# Altium PCB stm32f103cb_hm.PcbDoc
Units mm, origin at the board's own origin, x right, y up, seen from the top; angles counter-clockwise.
Board outline 49 x 35 mm, 2 copper layers (Top Layer, Bottom Layer), stack 1.571 mm thick; 61 components, 59 nets, 194 pads, 56 vias.
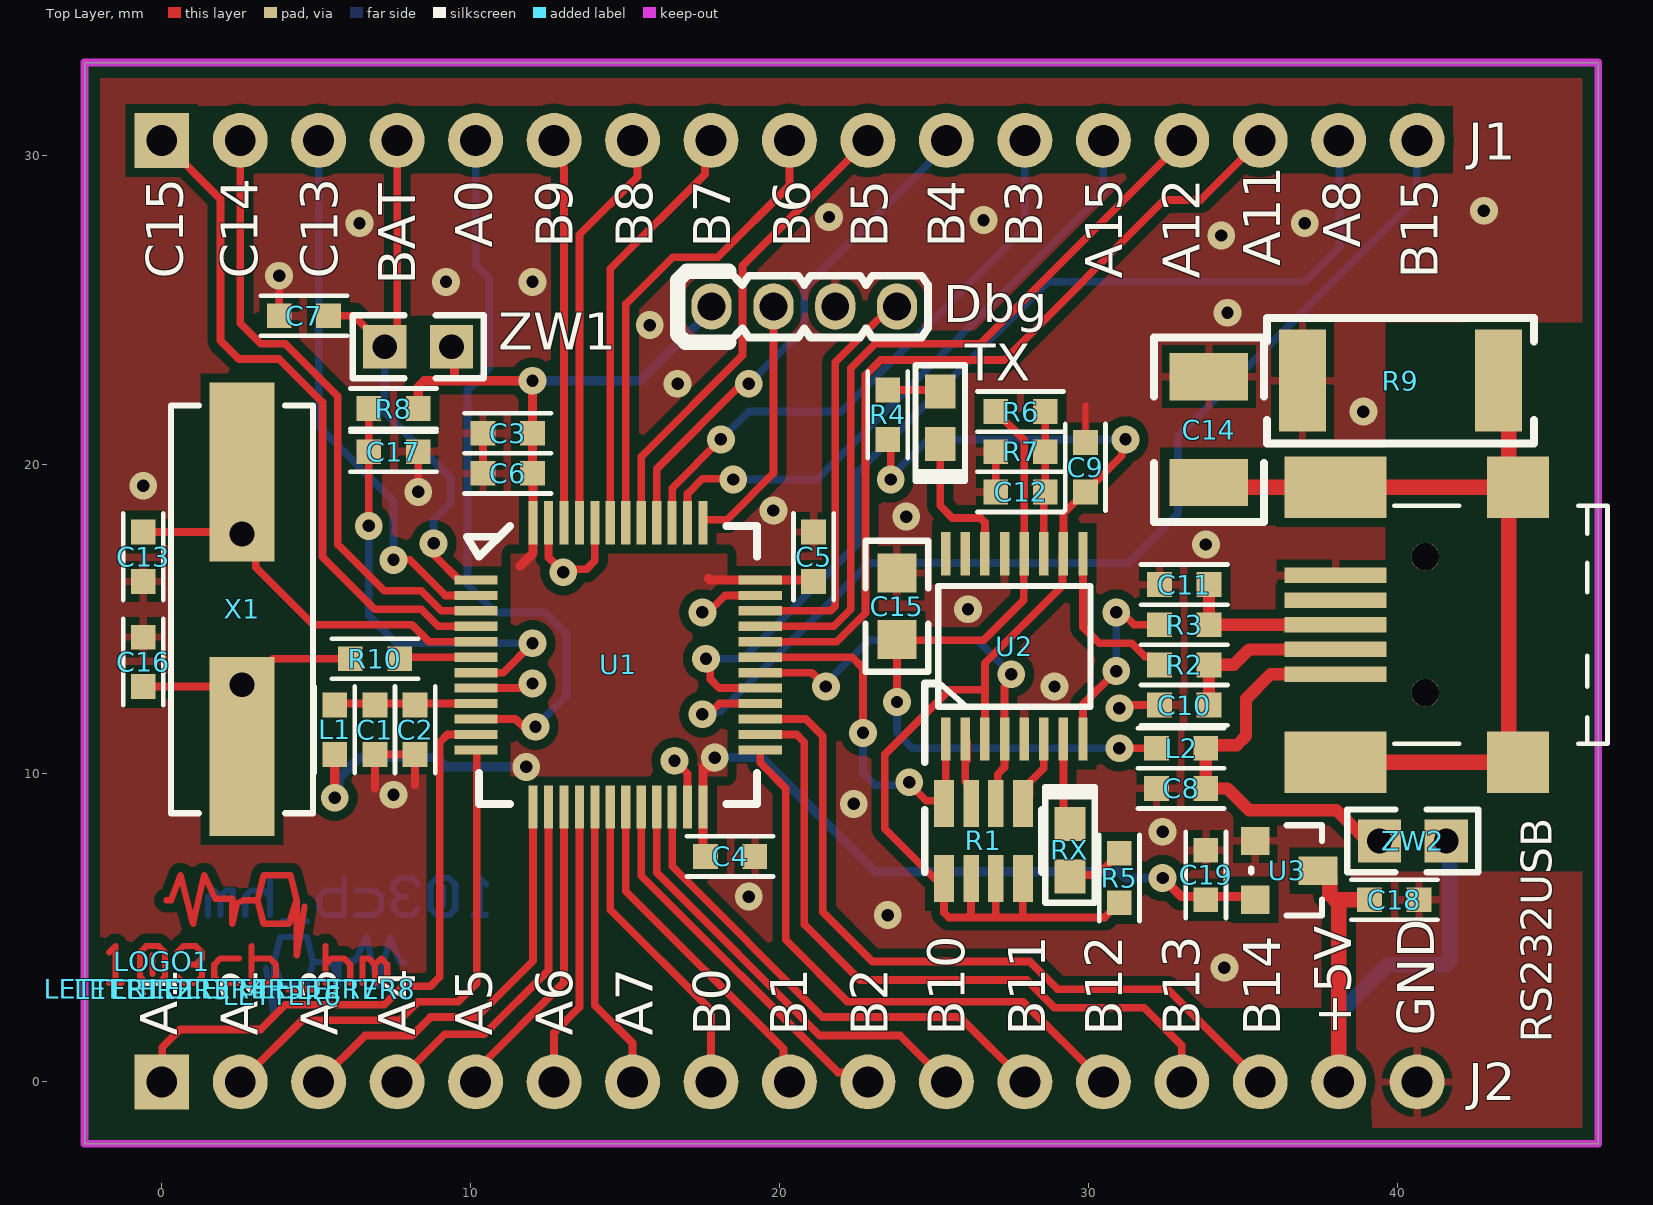
[diagram p0: Top Layer view]
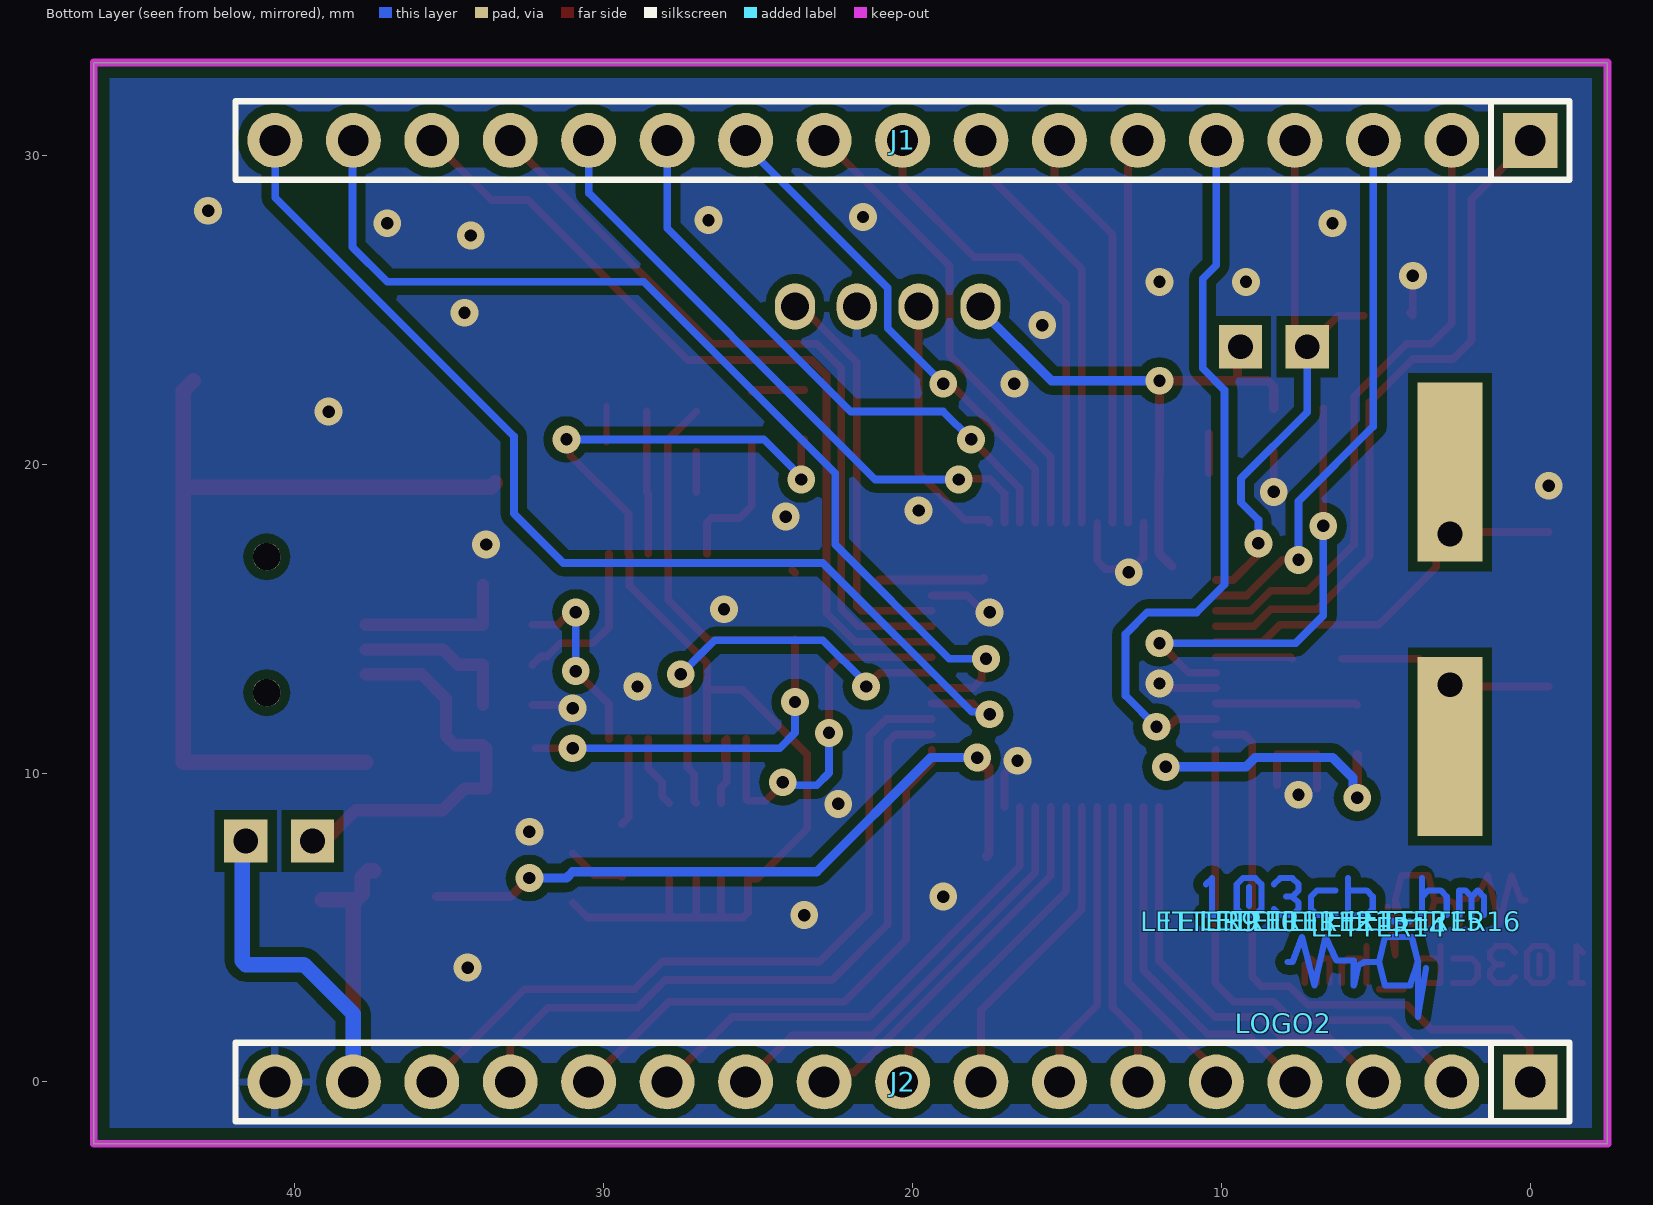
[diagram p1: Bottom Layer view, seen from below]

## Layer stack, top to bottom
Top Solder: solder mask 0.0102, Solder Resist, Dk 3.5
Top Layer: signal copper 0.0356
Dielectric 1: dielectric 1.5, FR-4, Dk 4.8
Bottom Layer: signal copper 0.0356
Bottom Solder: solder mask 0.0102, Solder Resist, Dk 3.5

## Board outline
-2.5,-2 46.5,-2 46.5,33 -2.5,33

## Design rules (kind name [scope] priority, off if disabled: settings)
AcuteAngle [All] p1: minimum=6.00000000000000E+0001 checktracksonly=TRUE
BoardOutlineClearance [not InComponent('RS232USB')] p1: gap=0.5 ignorepadtopadclearanceinfootprint=FALSE
Clearance InPolyClearance [InPoly] p1: gap=0.3 ignorepadtopadclearanceinfootprint=FALSE
Clearance ClearanceMidLayer [OnMid] p2: gap=0.153 ignorepadtopadclearanceinfootprint=FALSE
Clearance ClearanceOuterLayer [OnBottomLayer or OnTopLayer] p3: gap=0.153 ignorepadtopadclearanceinfootprint=FALSE
ComponentClearance [All] p1 off: gap=0.254 collisioncheckmode=3 verticalgap=0.254 showdistances=FALSE
Height [All] p1: minheight=0 maxheight=40 prefheight=12.7
HoleSize [All] p1: absolutevalues=TRUE maxlimit=6 minlimit=0.2 maxpercent=80.000 minpercent=20.000
MinimumAnnularRing MinimumAnnularRingOuterLayer [OnTopLayer or OnBottomLayer] p1: minimumring=0.155
MinimumAnnularRing MinimumAnnularRingOnMid [OnMid] p2: minimumring=0.2
MinimumSolderMaskSliver SilkscreenOverComponentPads [All] p1: minsoldermaskwidth=0.1
NetAntennae [All] p1: netantennaetolerance=0.3
PolygonConnect PolygonConnectDirect [IsVia] p1: connectstyle=Direct reliefconductorwidth=0.254 reliefentries=4 polygonreliefangle="90 Angle" airgapwidth=0.254
PolygonConnect PolygonConnectElse [All] p2: connectstyle=Relief reliefconductorwidth=0.25 reliefentries=4 polygonreliefangle="90 Angle" airgapwidth=0.25
RoutingCorners [All] p1 off: cornerstyle=45-Degree minsetback=2.54 maxsetback=2.54
RoutingVias [All] p1: holewidth=0.4 width=0.9 viastyle="Through Hole" minholewidth=0.3 minwidth=0.5 maxholewidth=2 maxwidth=4
SilkToSilkClearance [All] p1: silktosilkclearance=0.1
SilkToSolderMaskClearance SilkToSolderMaskClearanceVia [IsVia] p1: minsilkscreentomaskgap=0.1 clearancetoexposedcopper=TRUE
SilkToSolderMaskClearance SilkToSolderMaskClearancePad [IsPad] p2: minsilkscreentomaskgap=0.1 clearancetoexposedcopper=TRUE
SolderMaskExpansion [All] p1: expansion=0.1 istentingtop=FALSE
UnRoutedNet [All] p1: checkbadconnections=TRUE
UnpouredPolygon [All] p1: allowunpoured=TRUE
Width [All] p1: maxlimit=4 minlimit=0.102 preferedwidth=0.18 minimp=50.000000 maximp=50.000000 favimp=50.000000 checkconnectedcopper=TRUE
20 further rules are at their usual default settings.

## Components (designator, comment, footprint, x,y, rotation, side; value= is the part's Value field where it differs from the comment)
C1 "1u/16" 0603-IPC 6.9,11.4 r270 top
C2 "10n/50" 0603-IPC 8.2,11.4 r270 top
C3 "1u/16" 0603-IPC 11.2,21 r180 top
C4 "100n/50" 0603-IPC 18.4,7.3 r0 top
C5 "100n/50" 0603-IPC 21.1,17 r90 top
C6 "100n/50" 0603-IPC 11.2,19.7 r180 top
C7 "1u/16" 0603-IPC 4.6,24.8 r180 top
C8 "10n/50" 0603-IPC 33,9.5 r0 top
C9 "100n/50" 0603-IPC 29.9,19.9 r270 top
C10 "47p/50" 0603-IPC 33.1,12.2 r180 top
C11 "47p/50" 0603-IPC 33.1,16.1 r180 top
C12 "10n/50" 0603-IPC 27.8,19.1 r0 top
C13 "22p/50" 0603-IPC -0.6,17 r90 top
C14 "1n5/1k" 1210 33.9,19.4 r90 top
C15 "4u7/16" 0805 23.8,15.4 r90 top
C16 "22p/50" 0603-IPC -0.6,13.6 r270 top
C17 "100n/50" 0603-IPC 7.5,20.4 r0 top
C18 "1u/16" 0603-IPC 39.9,5.9 r0 top
C19 "1u/16" 0603-IPC 33.8,6.7 r90 top
Dbg "ZL303-04P" PLMS4S 17.8,25.1 r0 top
J1 "ZL201-17G" PLS17S 0,30.48 r0 bottom
J2 "ZL201-17G" PLS17S 0,0 r0 bottom
L1 "BLM18AG102SN1D" 0603-IPC 5.6,11.4 r270 top
L2 "BLM18AG102SN1D" 0603-IPC 33,10.8 r180 top
LETTER1 "LETTER_1_1m2_m2" LETTER_1_1m2_m2 -1.9,3 r0 top
LETTER2 "LETTER_0_1m2_m2" LETTER_0_1m2_m2 -0.9,3 r0 top
LETTER3 "LETTER_3_1m2_m2" LETTER_3_1m2_m2 0.3,3 r0 top
LETTER4 "LETTER_C_1m2_m2" LETTER_C_1m2_m2 1.5,3 r0 top
LETTER5 "LETTER_B_1M2_M2" LETTER_B_1M2_M2 2.7,3 r0 top
LETTER6 "LETTER_UNDERSCORE_1M2_M2" LETTER_UNDERSCORE_1M2_M2 3.9,2.8 r0 top
LETTER7 "LETTER_H_1M2_M2" LETTER_H_1M2_M2 5.1,3 r0 top
LETTER8 "LETTER_M_1M2_M2" LETTER_M_1M2_M2 6.3,3 r0 top
LETTER9 "LETTER_1_1m2_m2" LETTER_1_1m2_m2 10.7,5.2 r180 bottom
LETTER10 "LETTER_0_1m2_m2" LETTER_0_1m2_m2 9.7,5.2 r180 bottom
LETTER11 "LETTER_3_1m2_m2" LETTER_3_1m2_m2 8.5,5.2 r180 bottom
LETTER12 "LETTER_C_1m2_m2" LETTER_C_1m2_m2 7.3,5.2 r180 bottom
LETTER13 "LETTER_B_1M2_M2" LETTER_B_1M2_M2 6.1,5.2 r180 bottom
LETTER14 "LETTER_UNDERSCORE_1M2_M2" LETTER_UNDERSCORE_1M2_M2 4.9,5 r180 bottom
LETTER15 "LETTER_H_1M2_M2" LETTER_H_1M2_M2 3.7,5.2 r180 bottom
LETTER16 "LETTER_M_1M2_M2" LETTER_M_1M2_M2 2.5,5.2 r180 bottom
LOGO1 "MRQ_2_8" MRQ_2_8 0,3.9 r0 top
LOGO2 "MRQ_2_8" MRQ_2_8 8,1.9 r180 bottom
R1 "4x47k" 1206RP 26.6,7.8 r180 top
R2 "27R" 0603R 33.1,13.5 r180 top
R3 "27R" 0603R 33.1,14.8 r180 top
R4 "10k" 0603R 23.5,21.6 r270 top
R5 "10k" 0603R 31,6.6 r270 top
R6 "10k" 0603R 27.8,21.7 r0 top
R7 "15k" 0603R 27.8,20.4 r180 top
R8 "100k" 0603R 7.5,21.8 r180 top
R9 "910k" 2512 40.1,22.7 r0 top
R10 "220R" 0603R 6.9,13.7 r0 top
RS232USB "DS1104-BN0SR" USBMS1B5 38,14.8 r270 top
RX "KP-1608SGC" D0603 29.4,7.5 r90 top
TX "LED0603-RW120" D0603 25.2,21.5 r270 top
U1 "STM32F103CBT6" MS-026ABC 14.771,13.499 r0 top
U2 "FT230XS" MO-137AB 27.6,14.1 r90 top
U3 "MCP1700T3302ETT" SOT23-3 35.4,7.8 r270 top
X1 "8.00MHz" HC49/4HSMX_THT 2.6,15.3 r270 top
ZW1 "SHORT0805" SHORT0805 8.3,23.8 r0 top
ZW2 "SHORT0805" SHORT0805 40.5,7.8 r180 top

## Footprints (in the part's own frame and the unit in brackets; to place one, negate y for a bottom-side part, rotate by r counter-clockwise, add the part's x,y. Pads: shape width x height; smd on the part's side, far side on the other; paste and mask are expansions set on the pad)
0603-IPC [mm]
  rect 0.8x0.8 smd: 1(-0.8,0) 2(0.8,0)
  silkscreen extent -1.4,-0.65 1.4,0.65, body extent -0.8,-0.4 0.8,0.4, height 1
0603R [mm]
  rect 0.8x0.8 smd: 1(-0.8,0) 2(0.8,0)
  silkscreen extent -1.4,-0.65 1.4,0.65, body extent -0.8,-0.4 0.8,0.4, height 0.45
0805 [mil]
  rect 50x50 smd: 1(-42.5,0) 2(42.5,0)
  silkscreen extent -84,-40 84,40, body extent -39,-28 39,28, height 51
1206RP [mm]
  rect 0.65x1.524 smd: 1(-1.275,-1.219) 4(1.275,-1.219) 5(1.275,1.219) 8(-1.275,1.219)
  rect 0.5x1.524 smd: 2(-0.4,-1.219) 3(0.4,-1.219) 6(0.4,1.219) 7(-0.4,1.219)
  silkscreen extent -1.9,-1 1.9,1, body extent -1.6,-0.8 1.6,0.8, height 0.55
1210 [mil]
  rect 60x100 smd: 1(0,0) 2(135,0)
  silkscreen extent -50,-70 185,70, body extent 5,-49 130,49, height 75
2512 [mil]
  rect 60x130 smd: 1(125,0) 2(-125,0)
  silkscreen extent -170,-80 170,80, body extent -128,-63 128,63, height 26
D0603 [mm]
  rect 1.1x1 smd: ANOD(-0.85,0) CATH(0.85,0)
  silkscreen extent -1.7,-0.8 2.05,0.8, body extent -1.06,-0.7 0.94,0.7, height 1.35
HC49/4HSMX_THT [mm]
  rect 5.8x2.1 hole 0.8 copper offset -2,0: 1(-2.44,0)
  rect 5.8x2.1 hole 0.8 copper offset 2,0: 2(2.44,0)
  silkscreen extent -6.6,-2.3 6.6,2.3, body extent -6.35,-2.4 6.35,2.4, height 4
LETTER_0_1m2_m2 [mm]
  Top Layer lines w0.2: 0.6,0.5 0.6,1.1 ; 0.2,0.4 0.4,0.2 0.8,0.2 1,0.4 1,1.2 0.8,1.4 0.4,1.4 0.2,1.2 0.2,0.4
LETTER_1_1m2_m2 [mm]
  Top Layer lines w0.2: 0.2,0.2 0.6,0.2 ; 0.2,1.2 0.4,1.4 0.4,0.2
LETTER_3_1m2_m2 [mm]
  Top Layer lines w0.2: 0.2,0.4 0.4,0.2 0.8,0.2 1,0.4 1,0.6 0.8,0.8 ; 0.2,1.2 0.4,1.4 0.8,1.4 1,1.2 1,1 0.8,0.8 ; 0.6,0.8 0.8,0.8 ; 0.8,0.8 0.8,0.8 ; 0.8,0.8 0.8,0.8
LETTER_B_1M2_M2 [mm]
  Top Layer lines w0.2: 0.2,1 0.8,1 1,0.8 1,0.4 0.8,0.2 0.2,0.2 0.2,1.4
LETTER_C_1m2_m2 [mm]
  Top Layer lines w0.2: 1,0.2 0.4,0.2 0.2,0.4 0.2,0.8 0.4,1 1,1
LETTER_H_1M2_M2 [mm]
  Top Layer lines w0.2: 0.2,0.2 0.2,1.4 ; 0.2,0.8 0.4,1 0.8,1 1,0.8 1,0.2
LETTER_M_1M2_M2 [mm]
  Top Layer lines w0.2: 0.2,0.2 0.2,1 0.4,1 0.6,0.8 ; 0.6,0.2 0.6,0.8 ; 1,0.2 1,0.8 ; 0.6,0.8 0.8,1 1,0.8 ; 1,0.8 1,0.8
LETTER_UNDERSCORE_1M2_M2 [mm]
  Top Layer lines w0.2: 0.2,0.2 1,0.2
MO-137AB [mil]
  rect 55x12 smd: 1(-118,87.5) 2(-118,62.5) 3(-118,37.5) 4(-118,12.5) 5(-118,-12.5) 6(-118,-37.5) 7(-118,-62.5) 8(-118,-87.5) 9(118,-87.5) 10(118,-62.5) 11(118,-37.5) 12(118,-12.5) 13(118,12.5) 14(118,37.5) 15(118,62.5) 16(118,87.5)
  silkscreen extent -148,-97 77,114, body extent -119,-98 119,98, height 70
MRQ_2_8 [mm]
  Top Layer lines w0.203: 0.152,1.981 0.305,1.981 0.61,2.794 1.016,1.219 1.372,2.794 1.727,2.032 2.286,2.032 2.286,1.219 2.438,1.88 2.642,1.981 3.099,1.981 ; 4.623,1.778 4.369,0.203 4.369,1.981 ; 3.099,1.981 3.302,1.219 4.115,1.219 4.369,1.981 ; 3.099,1.981 3.302,2.794 4.166,2.794 4.369,1.981
  body extent 0.05,0.1 4.72,2.9, height 0.3
MS-026ABC [mm]
  rect 1.4x0.3 smd: 1(-4.6,2.75) 2(-4.6,2.25) 3(-4.6,1.75) 4(-4.6,1.25) 5(-4.6,0.75) 6(-4.6,0.25) 7(-4.6,-0.25) 8(-4.6,-0.75) 9(-4.6,-1.25) 10(-4.6,-1.75) 11(-4.6,-2.25) 12(-4.6,-2.75) 25(4.6,-2.75) 26(4.6,-2.25) 27(4.6,-1.75) 28(4.6,-1.25) 29(4.6,-0.75) 30(4.6,-0.25) 31(4.6,0.25) 32(4.6,0.75) 33(4.6,1.25) 34(4.6,1.75) 35(4.6,2.25) 36(4.6,2.75)
  rect 0.3x1.4 smd: 13(-2.75,-4.6) 14(-2.25,-4.6) 15(-1.75,-4.6) 16(-1.25,-4.6) 17(-0.75,-4.6) 18(-0.25,-4.6) 19(0.25,-4.6) 20(0.75,-4.6) 21(1.25,-4.6) 22(1.75,-4.6) 23(2.25,-4.6) 24(2.75,-4.6) 37(2.75,4.6) 38(2.25,4.6) 39(1.75,4.6) 40(1.25,4.6) 41(0.75,4.6) 42(0.25,4.6) 43(-0.25,4.6) 44(-0.75,4.6) 45(-1.25,4.6) 46(-1.75,4.6) 47(-2.25,4.6) 48(-2.75,4.6)
  silkscreen extent -4.9,-4.5 4.5,4.5, body extent -4.5,-4.5 4.5,4.5, height 1.6
PLMS4S [mm]
  oval 1.3x1.5 hole 0.9: 1(0,0) 2(2,0) 3(4,0) 4(6,0)
  silkscreen extent -1.1,-1.15 7,1.15, body extent -1,-1 7,1, height 6
PLS17S [mil]
  rect 70x70 hole 39.37: 1(0,0)
  round 70 hole 39.37: 2(100,0) 3(200,0) 4(300,0) 5(400,0) 6(500,0) 7(600,0) 8(700,0) 9(800,0) 10(900,0) 11(1000,0) 12(1100,0) 13(1200,0) 14(1300,0) 15(1400,0) 16(1500,0) 17(1600,0)
  silkscreen extent -50,-50 1650,50, body extent -50,-50 1650,50, height 336
SHORT0805 [mm]
  rect 1.4x1.4 hole 0.8: 1(-1.079,0) 2(1.079,0)
  silkscreen extent -2.12,-1.02 2.12,1.02, body extent -1.5,-0.4 1.5,0.4, height 0.9
SOT23-3 [mil]
  rect 36x36 smd: 1(0,0) 2(75,0)
  rect 36x50 smd: 3(38,80)
  silkscreen extent -20,-5 95,85, body extent -22,-7 97,87, height 43
USBMS1B5 [mm]
  rect 0.5x3.3 smd: 1(1.6,0) 2(0.8,0) 3(0,0) 4(-0.8,0) 5(-1.6,0)
  rect 1.981x3.302 smd: 6(-4.45,0) 9(4.45,0)
  rect 1.981x2 smd: 7(-4.45,5.9) 8(4.45,5.9)
  round 0.9 hole 0.9: 10(-2.2,2.9) 11(2.2,2.9)
  silkscreen extent -3.85,1.9 3.85,8.8, body extent -4.95,-0.4 4.95,8.8, height 4.14

## Part data
C1 C3 C7 C18 C19: library part CAP37, Manufacturer5=Samsung, DateOfPrice5=2020-05-10, Descript="Kondensator: ceramiczny; MLCC; 1uF; 16V; X7R; ±10%; SMD; 0603", ID=37, Kod=CAP37, Price5=0,07, Reference5=CL10B105KO8NNNC, Supplier5=tme.pl, Typ5=CL10B105KO8NNNC
C2 C8 C12: library part CAP20, Manufacturer5=AVX, DateOfPrice5=2020-05-10, Descript="Kondensator: ceramiczny; MLCC; 10nF; 50V; X7R; ±10%; SMD; 0603", ID=20, Kod=CAP20, Price5=0,08, Reference5=06035C103KAT2A, Supplier5=tme.pl, Typ5=06035C103KAT2A
C4 C5 C6 C9 C17: library part CAP6, Manufacturer5=Samsung, DateOfPrice5=2020-05-10, Descript="Kondensator: ceramiczny; MLCC; 100nF; 50V; X7R; ±5%; SMD; 0603", ID=6, Kod=CAP6, Price5=0,25, Reference5=CL10B104JB8NNNC, Supplier5=tme.pl, Typ5=CL10B104JB8NNNC
C10 C11: library part CAP85, Manufacturer5=Yageo, DateOfPrice5=2020-05-10, Descript="Kondensator: ceramiczny; MLCC; 47pF; 50V; C0G; ±5%; SMD; 0603", ID=85, Kod=CAP85, Price5=0,08, Reference5=CC0603JRNPO9470, Supplier5=tme.pl, Typ5=CC0603JRNPO9BN470
C13 C16: library part CAP53, Manufacturer5=Yageo, DateOfPrice5=2010-01-01, Descript="Kondensator: ceramiczny; MLCC; 22pF; 50V; C0G; ±5%; SMD; 0603", ID=53, Kod=CAP53, Price5=0, Reference5=CC0603JRNPO9220, Supplier5=tme.pl, Typ5=CC0603JRNPO9BN220
C14: library part CAP35, Manufacturer5=MULTICOMP, DateOfPrice5=2020-05-10, Descript="Ceramiczny kondensator wielowarstw. SMD, 1210 [jedn. metryczne: 3225], 1500 pF, 1 kV, ± 10%, X7R", ID=35, Kod=CAP35, Price5=2,4, Reference5=1855964, Supplier5=farnell.com, Typ5=MCCA000836
C15: library part CAP97, Manufacturer5=Kemet, DateOfPrice5=2020-05-10, Descript="Kondensator: ceramiczny; MLCC; 4,7uF; 16VDC; X7R; ±5%; SMD; 0805", ID=97, Kod=CAP97, Price5=1,5, Reference5=C0805C475J4RACAUTO, Supplier5=tme.pl, Typ5=C0805C475J4RACAUTO
Dbg: library part Con298, Manufacturer5=Ninigi, DateOfPrice5=2020-05-10, Descript="Listwa kołkowa; kołkowe; męskie; PIN:4; proste; 2mm; THT; 1x4", ID=298, Kod=Con298, Price5=0,2, Reference5=ZL303-04P, Replacement=bd, Supplier5=tme.pl, Typ5=ZL303-04P
J1 J2: library part CON82, Manufacturer5=Connfly, DateOfPrice5=2020-12-08, Descript="Listwa kołkowa; kołkowe; męskie; PIN: 20; proste; 2,54mm; THT; 1x20", ID=82, Kod=CON82, Price5=1, Reference5=ZL201-20G, Replacement=bd, Supplier5=tme, Typ5=DS1021-1*20SF11
L1 L2: library part Ind41, InductCurr=-, Manufacturer5=Murata, DateOfPrice5=2020-05-10, Descript="Ferryt: koralik; Imp.@ 100MHz:1000om; Montaż: SMD; 0,4A; Obud:0603", ID=41, Kod=Ind41, Price5=0, Reference5=BLM18AG102SN1D, Supplier5=tme.pl, Typ5=BLM18AG102SN1D
LETTER1 LETTER9: library part NOB9, Descript=bd, ID=9, Kod=NOB9
LETTER2 LETTER10: library part NOB8, Descript=bd, ID=8, Kod=NOB8
LETTER3 LETTER11: library part NOB11, Descript=bd, ID=11, Kod=NOB11
LETTER4 LETTER12: library part NOB13, Descript=bd, ID=13, Kod=NOB13
LETTER5 LETTER13: library part NOB15, Descript=bd, ID=15, Kod=NOB15
LETTER6 LETTER14: library part NOB17, Descript=bd, ID=17, Kod=NOB17
LETTER7 LETTER15: library part NOB19, Descript=bd, ID=19, Kod=NOB19
LETTER8 LETTER16: library part NOB21, Descript=bd, ID=21, Kod=NOB21
LOGO1 LOGO2: library part NOB5, Descript=bd, ID=5, Kod=NOB5
R1: library part Res182, Manufacturer5="Royal Ohm", DateOfPrice5=2020-05-10, Descript="Drabinka rezystorowa: Y; 47kΩ; SMD; 1206; Il.rezystorów:4; 63mW", ID=182, Kod=Res182, Price5=0,1, Reference5=DR1206-47K-4/8, Supplier5=tme.pl, Typ5=4D03WGJ0473T
R2 R3: library part Res106, Manufacturer5="Royal Ohm", DateOfPrice5=2020-05-10, Descript="Rezystor: thick film; SMD; 0603; 27Ω; 0,1W; ±1%; -55÷125°C", ID=106, Kod=Res106, Price5=0,1, Reference5=SMD0603-27R-1%, Supplier5=tme.pl, Typ5=0603SAF270JT5E
R4 R5 R6: library part Res15, Manufacturer5="Royal Ohm", DateOfPrice5=2020-05-10, Descript="Rezystor: thick film; SMD; 0603; 10kom; 0,1W; ±1%; -55÷125°C", ID=15, Kod=Res15, Price5=0,08, Reference5=SMD0603-10K-1%, Supplier5=tme.pl, Typ5="0603WGF 10K T5E"
R7: library part Res39, Manufacturer5="Royal Ohm", DateOfPrice5=2020-05-10, Descript="Rezystor: thick film; SMD; 0603; 15kΩ; 0,1W; ±1%; -55÷125°C", ID=39, Kod=Res39, Price5=0,08, Reference5=SMD0603-15K-1%, Supplier5=tme.pl, Typ5=0603WGF15KT5E
R8: library part Res9, Manufacturer5="Royal Ohm", DateOfPrice5=2020-06-25, Descript="Rezystor: thick film; SMD; 0603; 100kom; 0,1W; ±1%; -55÷125°C", ID=9, Kod=Res9, Price5=0,1, Reference5=SMD0603-100K-1%, Supplier5=tme.pl, Typ5=0603SAF1003T5E
R9: library part Res235, Manufacturer5=Panasonic, DateOfPrice5=2020-05-10, Descript="Rezystor SMD, grubowarstwowy, 2512 [jedn. metryczne: 6432], 910 kohm, Seria ERJU1T, 200 V", ID=235, Kod=Res235, Price5=1,14, Reference5=2381073, Supplier5=farnell, Typ5=ERJU1TF9103U
R10: library part Res87, Manufacturer5="Royal Ohm", DateOfPrice5=2020-06-25, Descript="Rezystor: thick film; SMD; 0603; 220om; 0,1W; ±1%; -55÷125°C", ID=87, Kod=Res87, Price5=0,1, Reference5=SMD0603-220R-1%, Supplier5=tme.pl, Typ5=0603SAF2200T5E
RS232USB: library part Con41, Manufacturer5=Connfly, DateOfPrice5=2010-01-01, Descript="Gniazdo; USB B mini; SMT; PIN: 5; poziome; Opakowanie: taśma", ID=41, Kod=Con41, Price5=2, Reference5=MUSB-G5P, Replacement=bd, Supplier5=tme.pl, Typ5=DS1104-BN0SR
RX: library part Opt8, Manufacturer5="Kingbright Electronic", DateOfPrice5=2020-05-10, Descript="LED; SMD; 0603; zielony; 4-15mcd; 120°; 1,6x0,8mm", ID=8, Kod=Opt8, Price5=0,8, Reference5=KP-1608SGC, Supplier5=tme.pl, Typ5=KP-1608SGC
TX: library part Opt25, Manufacturer5=Honglitronic, DateOfPrice5=2020-05-10, Descript="Dioda LED, SMD 0603, Czerwona 626-636nm, 50-70 mCd /10mA, water clear, 120°", ID=25, Kod=Opt25, Price5=0,12, Reference5=LED0603-RW120, Supplier5=maritex.com.pl, Typ5=LED0603-RW120
U1: library part ICs272, Manufacturer5=ST, DateOfPrice5=2020-05-10, Descript="ARM Cortex-M3 CPU, 128kB Flash, 20kB RAM, USB, CAN, 3xUART, 2xI2C, 2xSPI, ADC, STM, LQFP48, RoHS", ID=272, Kod=ICs272, Price5=13, Reference5=42865, Supplier5=kamami.pl, Typ5=STM32F103CBT6
U2: library part ICs109, Manufacturer5=FTDI, DateOfPrice5=2020-05-10, Descript="Interfejs; USB-basic UART; Ilość pinów CBUS:4; tuba; SSOP16", ID=109, Kod=ICs109, Price5=8,8, Reference5=FT230XS-R, Supplier5=tme.pl, Typ5=FT230XS-R
U3: library part ICs182, Manufacturer5=Microchip, DateOfPrice5=2020-05-10, Descript="Stabilizator napięcia; LDO, nieregulowany; 3,3V; 0,25A; SOT23-3", ID=182, Kod=ICs182, Price5=1,8, Reference5=MCP1700T3302ETT, Supplier5=tme.pl, Typ5=MCP1700T3302E/TT
X1: library part Qua16, Freq=-, Manufacturer5=YIC, DateOfPrice5=2020-05-10, Descript="Rezonator: kwarcowy; 8MHz; ±30ppm; 20pF; SMD; HC49SM", ID=16, Kod=Qua16, Price5=2, Reference5=8.00M-SMDHC49S, Supplier5=tme.pl
ZW1 ZW2: library part Res238, Manufacturer5=-, Descript="Przewlekana zwora z drutu na planie rezystora 0805", ID=238, Kod=Res238, Price5=0,1, Reference5=-, Supplier5=-, Typ5=-

## Via types
v1: diameter 0.9, hole 0.4, Top Layer to Bottom Layer, 56 vias

## Nets (pads, with @x,y where several pads share a name; then routed paths per layer and width w, separated by ;. In a path a pad name is that pad's centre, name@x,y a point inside that pad or via, vN(x,y) a via of type N, cw(c..) or ccw(c..) an arc to the next point about the centre after c; other vN are vias at no path point)
+3V3: C3.1 C4.1 C5.1 C6.1 C19.1 Dbg.1 L1.2 R8.1 U1.24 U1.36 U1.48 U3.2 ZW1.2 | length 53.6
  Top Layer w0.3: v1(5.6,9.2) L1.2 ; R8.1 8.3,22.5 8.5,22.7 9.5,22.7 ; ZW1.2@9.48,23.8 9.48,22.72 9.5,22.7 ; 11.6,16.7 12.021,17.121 U1.48 12.021,19.679 C6.1 C3.1 v1(12,22.7) 9.5,22.7 ; C4.1 17.521,7.379 U1.24 17.521,10.179 17.9,10.179 v1(17.9,10.5) ; 17.7,16.3 17.751,16.249 U1.36 21.051,16.249 C5.1 ; v1(32.4,6.6) 33,6 U3.2@35.4,6
  Bottom Layer w0.3: v1(5.6,9.2) 5.738,9.338 5.738,9.838 6.4,10.5 8.9,10.5 9.2,10.2 v1(11.8,10.2) ; v1(12,22.7) 15.5,22.7 17.8,25 Dbg.1 ; v1(17.9,10.5) 19.4,10.5 23.1,6.8 31,6.8 31.2,6.6 v1(32.4,6.6)
+5V: C18.1 J2.16 U3.3 ZW2.1 | length 18.4
  Top Layer w0.5: U3.3 37.61,6.835 37.817,6.628 37.817,6.083 38.1,5.8 ; J2.16 38.1,5.9 C18.1
  Bottom Layer w0.5: J2.16 38.1,2.2 39.7,3.8 41.583,3.8 41.7,3.917 41.7,7.28 ZW2.1@41.58,7.4
DIAG-RXD: R1.4 U1.31 U2.1 | length 12
  Top Layer w0.25: U1.31 22.351,13.749 22.7,13.4 v1(22.7,11.3) ; v1(24.2,9.7) 24.2,9.652 24.752,9.1 25.325,9.1 25.378,9.153 U2.1
  Bottom Layer w0.25: v1(22.7,11.3) 22.7,10 23.1,9.6 24.1,9.6 v1(24.2,9.7)
DIAG-TXD: R1.2 U1.30 U2.4 | length 13.8
  Top Layer w0.25: U1.30 21.051,13.249 v1(21.5,12.8) ; R1.2 27.064,9.083 27.064,9.964 27.283,10.183 U2.4 27.283,12.788 27.5,13.005 v1(27.5,13.2)
  Bottom Layer w0.25: v1(21.5,12.8) 21.5,12.9 22.9,14.3 26.4,14.3 26.781,13.919 v1(27.5,13.2)
GND: C1.2 C2.2 C3.2 C4.2 C5.2 C6.2 C7.2 C8.1 C9.1 C10.2 C11.2 C12.1 C13.1 C14.2 C15.2 C16.1 C17.2 C18.2 C19.2 Dbg.3 J2.17 R7.2 R9.2 RS232USB.5 U1.8 U1.23 U1.35 U1.44 U1.47 U2.5 U2.13 U3.1 | length 21.3
  Top Layer w0.2: C9.1 29.9,21.9
  Top Layer w0.25: v1(3.8,26.1) C7.2 C7.2@3.9,24.9 ; 6.9,9.5 C1.2 C2.2 8.2,9.6 ; v1(8.3,19.1) C17.2 ; U1.8 11.849,12.749 v1(12,12.9) ; C6.2 C3.2 ; U1.47 12.521,16.979 v1(13,16.5) 13.099,16.599 13.75,16.599 14.021,16.87 U1.44 ; v1(16.6,10.4) 17.021,9.979 U1.23 ; v1(17.5,15.2) 17.689,15.2 18.238,15.749 U1.35 ; C15.2 C15.2@23.879,16.559 ; C12.1 R7.2 ; v1(31,12.1) 31.1,12.2 C10.2
  other v1: 34.4,3.7 23.5,5.4 19,6 32.4,8.1 22.4,9 7.5,9.3 28.9,12.8 26.1,15.3 33.8,17.4 24.1,18.3 19.8,18.5 -0.6,19.3 38.9,21.7 16.7,22.6 15.8,24.5 34.5,24.9 9.2,25.9 12,25.9 34.3,27.4 6.4,27.8 37,27.8 26.6,27.9 21.6,28 42.8,28.2
NetC1_1: C1.1 C2.1 L1.1 U1.9 | length 4.6
  Top Layer w0.25: L1.1 5.649,12.249 U1.9
NetC10_1: C10.1 R2.1 RS232USB.2 | length 5.3
  Top Layer w0.4: C10.1 R2.1 34.7,13.5 35.2,14 RS232USB.2@37.7,14
NetC11_1: C11.1 R3.1 RS232USB.3 | length 5.1
  Top Layer w0.4: C11.1 R3.1 RS232USB.3@37.7,14.8
NetC12_2: C12.2 R6.2 R7.1 U2.11 | length 4.6
  Top Layer w0.25: U2.11 28.553,19.052 C12.2 R7.1 R6.2
NetC16_2: C16.2 R10.1 X1.2 | length 7.1
  Top Layer w0.25: C16.2 2.69,12.8 3.59,13.7 R10.1
NetR2_2: R2.2 U2.9 | length 5.4
  Top Layer w0.25: U2.9 29.823,14.723 30.345,14.2 31.4,14.2 31.825,13.775 32.025,13.775 R2.2
NetR3_2: R3.2 U2.8 | length 6.1
  Top Layer w0.25: U2.8 29.823,12.223 v1(30.9,13.3) ; v1(30.9,15.2) 31.076,15.2 31.476,14.8 R3.2
  Bottom Layer w0.25: v1(30.9,13.3) v1(30.9,15.2)
NetR4_1: R4.1 TX.ANOD | length 1.7
  Top Layer w0.25: R4.1 25.15,22.4 TX.ANOD
NetR5_1: R5.1 RX.ANOD | length 1.9
  Top Layer w0.25: RX.ANOD 29.45,6.7 30.3,6.7 R5.1
NRST: C17.1 R8.2 U1.7 | length 14.6
  Top Layer w0.25: v1(6.7,18) C17.1 R8.2 ; U1.7 11.049,13.249 v1(12,14.2)
  Bottom Layer w0.25: v1(6.7,18) 6.7,15.1 7.6,14.2 v1(12,14.2)
OSC_IN: C13.2 U1.5 X1.1 | length 12.7
  Top Layer w0.25: C13.2 2.69,17.8 3.043,17.447 3.043,16.657 4.9,14.8 8.1,14.8 8.651,14.249 U1.5
OSC_OUT: R10.2 U1.6 | length 2.5
  Top Layer w0.25: R10.2 7.749,13.749 U1.6
PA0: J1.5 U1.10 | length 24.2
  Top Layer w0.25: U1.10 11.451,11.749 11.7,11.5 v1(12.1,11.5)
  Bottom Layer w0.25: J1.5 10.16,26.44 10.6,26 10.6,23.1 9.9,22.4 9.9,16.1 10.8,15.2 12.4,15.2 13.1,14.5 13.1,12.5 v1(12.1,11.5)
PA1: J2.1 U1.11 | length 19.9
  Top Layer w0.25: J2.1 0.018,0.018 0.018,1.118 0.6,1.7 3.2,1.7 4,2.5 7.2,2.5 7.8,3.1 8.7,3.1 9,3.4 9,11 9.249,11.249 U1.11
PA2: J2.2 U1.12 | length 16.5
  Top Layer w0.25: J2.2 4.54,2 7.7,2 8.3,2.6 9.6,2.6 10.2,3.2 10.2,10.72 U1.12
PA3: J2.3 U1.13 | length 13.5
  Top Layer w0.25: J2.3 6.58,1.5 8.1,1.5 8.7,2.1 10.2,2.1 12.021,3.921 U1.13
PA4: J2.4 U1.14 | length 11.7
  Top Layer w0.25: J2.4 9.16,1.54 10.44,1.54 12.521,3.621 U1.14
PA5: J2.5 U1.15 | length 10.1
  Top Layer w0.25: J2.5 10.16,0.36 13.021,3.221 U1.15
PA6: J2.6 U1.16 | length 9.2
  Top Layer w0.25: J2.6 12.7,1.6 13.521,2.421 U1.16
PA7: J2.7 U1.17 | length 9.4
  Top Layer w0.25: U1.17 14.021,2.479 15.24,1.26 J2.7
PA8: J1.16 U1.29 | length 33.3
  Top Layer w0.25: v1(17.618,13.7) 17.756,13.562 17.756,13.044 18.051,12.749 U1.29
  Bottom Layer w0.25: v1(17.618,13.7) 18.802,13.7 22.5,17.398 22.5,19.7 28.7,25.9 37,25.9 38.125,27.025 38.125,30.455 J1.16
PA11: J1.15 U1.32 | length 27.4
  Top Layer w0.25: U1.32 21.849,14.249 22.784,15.184 22.784,22.884 23.268,23.368 27.268,23.368 32.453,28.553 33.633,28.553 J1.15
PA12: J1.14 U1.33 | length 24.8
  Top Layer w0.25: U1.33 21.749,14.749 22.3,15.3 22.3,23.1 23.1,23.9 26.5,23.9 33.02,30.42 J1.14
PA15: J1.13 U1.38 | length 20.2
  Top Layer w0.25: U1.38 17.021,19.047 17.498,19.524 18.476,19.524 v1(18.5,19.5)
  Bottom Layer w0.25: v1(18.5,19.5) 21.2,19.5 30.48,28.78 J1.13
PB0: J2.8 U1.18 | length 10.2
  Top Layer w0.25: U1.18 14.521,5.579 17.78,2.32 J2.8
PB1: J2.9 U1.19 | length 11.1
  Top Layer w0.25: U1.19 15.021,6.179 20.128,1.072 20.128,0.192 J2.9
PB2: J2.10 U1.20 | length 12.3
  Top Layer w0.25: U1.20 15.521,6.679 21.894,0.306 22.554,0.306 J2.10
PB3: J1.12 U1.39 | length 18.9
  Top Layer w0.25: U1.39 16.521,19.221 v1(18.1,20.8)
  Bottom Layer w0.25: v1(18.1,20.8) 19,21.7 22,21.7 27.94,27.64 J1.12
PB4: J1.11 U1.40 | length 16.4
  Top Layer w0.25: U1.40 16.021,19.842 18.779,22.6 v1(19,22.6)
  Bottom Layer w0.25: v1(19,22.6) 20.8,24.4 20.8,25.7 25.4,30.3 J1.11
PB5: J1.10 U1.41 | length 15.4
  Top Layer w0.25: U1.41 15.521,20.242 18.8,23.521 18.8,26.42 J1.10
PB6: J1.9 U1.42 | length 15.4
  Top Layer w0.25: U1.42 15.021,25.181 16.54,26.7 18,26.7 20.32,29.02 J1.9
PB7: J1.8 U1.43 | length 13.7
  Top Layer w0.25: U1.43 14.521,26.321 17.586,29.386 17.586,30.286 J1.8
PB8: J1.7 U1.45 | length 13.2
  Top Layer w0.25: U1.45 13.521,27.421 15.4,29.3 15.4,30.32 J1.7
PB9: J1.6 U1.46 | length 12.5
  Top Layer w0.25: J1.6 13.002,30.178 13.002,29.593 13.021,29.574 U1.46
PB10: J2.11 U1.21 | length 14.3
  Top Layer w0.25: U1.21 16.021,6.779 21.3,1.5 23.9,1.5 J2.11
PB11: J2.12 U1.22 | length 16.2
  Top Layer w0.25: U1.22 16.521,6.979 21.4,2.1 25.84,2.1 J2.12
PB12: J2.13 U1.25 | length 18.7
  Top Layer w0.25: U1.25 19.371,10.329 20.2,9.5 20.2,4.6 22.2,2.6 27.88,2.6 J2.13
PB13: J2.14 U1.26 | length 22.5
  Top Layer w0.25: U1.26 20.551,11.249 20.8,11 20.8,5.1 22.6,3.3 28,3.3 28.9,2.4 31.8,2.4 33.02,1.18 J2.14
PB14: J2.15 U1.27 | length 24.4
  Top Layer w0.25: U1.27 20.851,11.749 21.4,11.2 21.4,5.5 23,3.9 28.1,3.9 29,3 32.56,3 33.56,2 J2.15
PB15: J1.17 U1.28 | length 35.4
  Top Layer w0.25: v1(17.5,11.9) 17.695,11.9 18.044,12.249 U1.28
  Bottom Layer w0.25: v1(17.5,11.9) 17.58,11.98 18.08,11.98 22.9,16.8 31.3,16.8 32.9,18.4 32.9,20.9 40.626,28.626 40.626,30.466 J1.17
PC13: J1.3 U1.2 | length 17.7
  Top Layer w0.25: v1(7.5,16.9) 8.029,16.9 9.18,15.749 U1.2
  Bottom Layer w0.25: J1.3 5.08,21.22 7.5,18.8 v1(7.5,16.9)
PC14: J1.2 U1.3 | length 20.2
  Top Layer w0.25: J1.2 2.54,24.56 3.2,23.9 4,23.9 5.7,22.2 5.7,17.4 7.2,15.9 8.4,15.9 9.051,15.249 U1.3
PC15: J1.1 U1.4 | length 22.3
  Top Layer w0.25: J1.1 1.9,28.58 1.9,24 2.5,23.4 3.8,23.4 5.2,22 5.2,17 6.9,15.3 8.4,15.3 8.951,14.749 U1.4
PGND: C14.1 R9.1 RS232USB.6 RS232USB.7 RS232USB.8 RS232USB.9 | length 28.5
  Top Layer w0.5: C14.1@33.5,19.4 33.65,19.25 37.7,19.25 RS232USB.7@43.6,19.25 ; RS232USB.9@37.7,10.35 RS232USB.8@43.6,10.35 ; R9.1 43.6,22.375 RS232USB.7@43.6,19.25 ; RS232USB.8@43.6,10.35 RS232USB.7@43.6,19.25
SWCLK: Dbg.2 U1.37 | length 8.4
  Top Layer w0.25: U1.37 17.521,18.15 17.571,18.2 18.3,18.2 19.8,19.7 Dbg.2
SWDIO: Dbg.4 U1.34 | length 13.1
  Top Layer w0.25: U1.34 21.654,15.249 21.8,15.395 21.8,23.3 23.175,24.675 23.191,24.675 23.616,25.1 Dbg.4
USB-CBUS1: TX.CATH U2.14 | length 4.7
  Top Layer w0.25: TX.CATH 25.2,18.65 25.595,18.255 26.501,18.255 26.648,18.109 U2.14
USB-CBUS2: RX.CATH U2.7 | length 2.8
  Top Layer w0.25: U2.7 29.188,8.563 RX.CATH
USB-CTS: R1.1 U2.6 | length 2.4
  Top Layer w0.25: R1.1 28.1,9.244 28.1,9.7 28.553,10.153 U2.6
USB-RTS: R1.3 U2.2 | length 2.9
  Top Layer w0.25: U2.2@26.075,10.425 26.075,11.04 U2.2 26.013,10.425 26.013,9.719 26.2,9.531 R1.3
USB-VBUS: C15.1 L2.2 R6.1 U2.12 | length 22.8
  Top Layer w0.25: v1(23.8,12.3) C15.1 23.821,14.3 26.6,14.3 27.9,15.6 27.9,17.08 U2.12 27.918,20.782 R6.1 ; v1(31,10.8) L2.2
  Bottom Layer w0.25: v1(23.8,12.3) 23.8,11.3 24.3,10.8 v1(31,10.8)
USB-VCCIO: C9.2 R1.5 R1.6 R1.7 R1.8 R4.2 R5.2 U2.3 U2.10 | length 40.9
  Top Layer w0.25: R4.2 23.6,20.7 v1(23.6,19.5) ; R1.6 26.2,5.387 26.138,5.325 ; U2.3 26.648,12.7 ; 27,5.391 R1.7 ; 27.875,5.402 R1.8 ; R5.2 30.525,5.325 27.981,5.325 27.9,5.325 27.194,5.325 27,5.325 26.138,5.325 ; v1(31.2,20.8) 31.076,20.676 31.076,20.276 29.188,18.387 U2.10 29.156,17.066 29.156,16.056 26.648,13.548 26.648,12.7 ; 26.138,5.325 25.475,5.325 25.325,5.475 R1.5 25.019,6.581 23.4,8.2 23.4,10.6 25.5,12.7 26.648,12.7
  Bottom Layer w0.25: v1(23.6,19.5) 23.6,19.589 24.811,20.8 v1(31.2,20.8)
VBAT: C7.1 J1.4 U1.1 ZW1.1 | length 18.6
  Top Layer w0.25: C7.1 6.221,24.8 ZW1.1 7.62,24.199 J1.4 ; v1(8.8,17.435) 8.8,17.07 9.621,16.249 U1.1
  Bottom Layer w0.25: ZW1.1 7.221,21.68 9.367,19.533 9.367,18.767 8.8,18.2 v1(8.8,17.435)
VUSB: C8.2 L2.1 RS232USB.1 ZW2.2 | length 13.4
  Top Layer w0.4: RS232USB.1@37.7,13.2 35.9,13.2 35.1,12.4 35.1,11.2 34.8,10.9 33.9,10.9 L2.1 C8.2 34.5,9.5 35.2,8.8 38.021,8.8 ZW2.2@39.421,7.4
pads on no net: RS232USB.4 RS232USB.10 RS232USB.11 U2.15 U2.16

## Polygon pours and split planes (outlines as drawn)
GND on Top Layer "GND_T" (solid, remove dead copper, pour order 2): -2.5,-2 46.5,-2 46.5,33 -2.5,33
+3V3 on Top Layer "+3V3_L01_P-001" (solid, remove dead copper, pour order 1): 11.3,17.1 18.3,17.1 18.3,9.9 11.3,9.9
GND on Bottom Layer "GND" (solid, remove dead copper, pour order 0): -2.5,33 46.1,33 46.1,-2 -2.5,-2

## Keep-outs
Keep-Out Layer:
  the board outline again, w0.254

## Other copper
Top Layer:
  pour cut-out: 37.1,2.4 37.7,2.4 37.7,1.8 37.785,1.783 39.1,0.6 39.2,-1.8 -2,-1.8 -2,2.4
  pour cut-out: -1.1,29.4 41.8,29.4 41.8,31.6 -1.1,31.6
  pour cut-out: 39.6,20.541 32.3,20.541 32.3,18 39.6,18 39.6,6.8 46.5,6.8 46.5,24.6 39.6,24.6
  pour cut-out: 0.3,21.9 4.9,21.9 4.9,8.7 0.3,8.7
Bottom Layer:
  pour cut-out: 41.6,30.6 41.3,31.4 -0.9,31.4 -0.9,29.6 41.4,29.6
  pour cut-out: -0.9,0.6 39.1,0.6 39.1,-0.7 -0.9,-0.7

## Silkscreen, mask and mechanical layers (free items; w line width, h text height)
Top Overlay:
  text "A0" at 10.7,27.001 h1.2 r90
  text "B9" at 13.3,27.001 h1.2 r90
  text "B8" at 15.9,27.001 h1.2 r90
  text "B7" at 18.4,27.001 h1.2 r90
  text "B6" at 21,27.001 h1.2 r90
  text "B5" at 23.5,27.001 h1.2 r90
  text "B4" at 26,27.001 h1.2 r90
  text "B3" at 28.5,27.001 h1.2 r90
  text "A8" at 38.8,27.001 h1.2 r90
  text "A11" at 36.2,26.401 h1.2 r90
  text "C15" at 0.7,26.001 h1.2 r90
  text "C14" at 3.1,26.001 h1.2 r90
  text "C13" at 5.7,26.001 h1.2 r90
  text "A15" at 31.1,26.001 h1.2 r90
  text "A12" at 33.6,26.001 h1.2 r90
  text "B15" at 41.3,26.001 h1.2 r90
  text "BAT" at 8.2,25.801 h1.2 r90
  text "A1" at 0.5,1.5 h1.2 r90
  text "A2" at 3.1,1.5 h1.2 r90
  text "A3" at 5.7,1.5 h1.2 r90
  text "A4" at 8.2,1.5 h1.2 r90
  text "A5" at 10.7,1.5 h1.2 r90
  text "A6" at 13.3,1.5 h1.2 r90
  text "A7" at 15.9,1.5 h1.2 r90
  text "B0" at 18.4,1.5 h1.2 r90
  text "B1" at 20.9,1.5 h1.2 r90
  text "B2" at 23.5,1.5 h1.2 r90
  text "B10" at 26,1.5 h1.2 r90
  text "B11" at 28.6,1.5 h1.2 r90
  text "B12" at 31.1,1.5 h1.2 r90
  text "B13" at 33.6,1.5 h1.2 r90
  text "B14" at 36.2,1.5 h1.2 r90
  text "+5V" at 38.5,1.5 h1.2 r90
  text "GND" at 41.2,1.5 h1.2 r90
Obrys:
  the board outline again, w0.254

## Dimensions
46.5,-2 to 46.5,33 on Wym
-2.5,-2 to 46.5,33 on Wym